# EAGLE board Tecla Shield Through Hole (EAGLE 5.10)
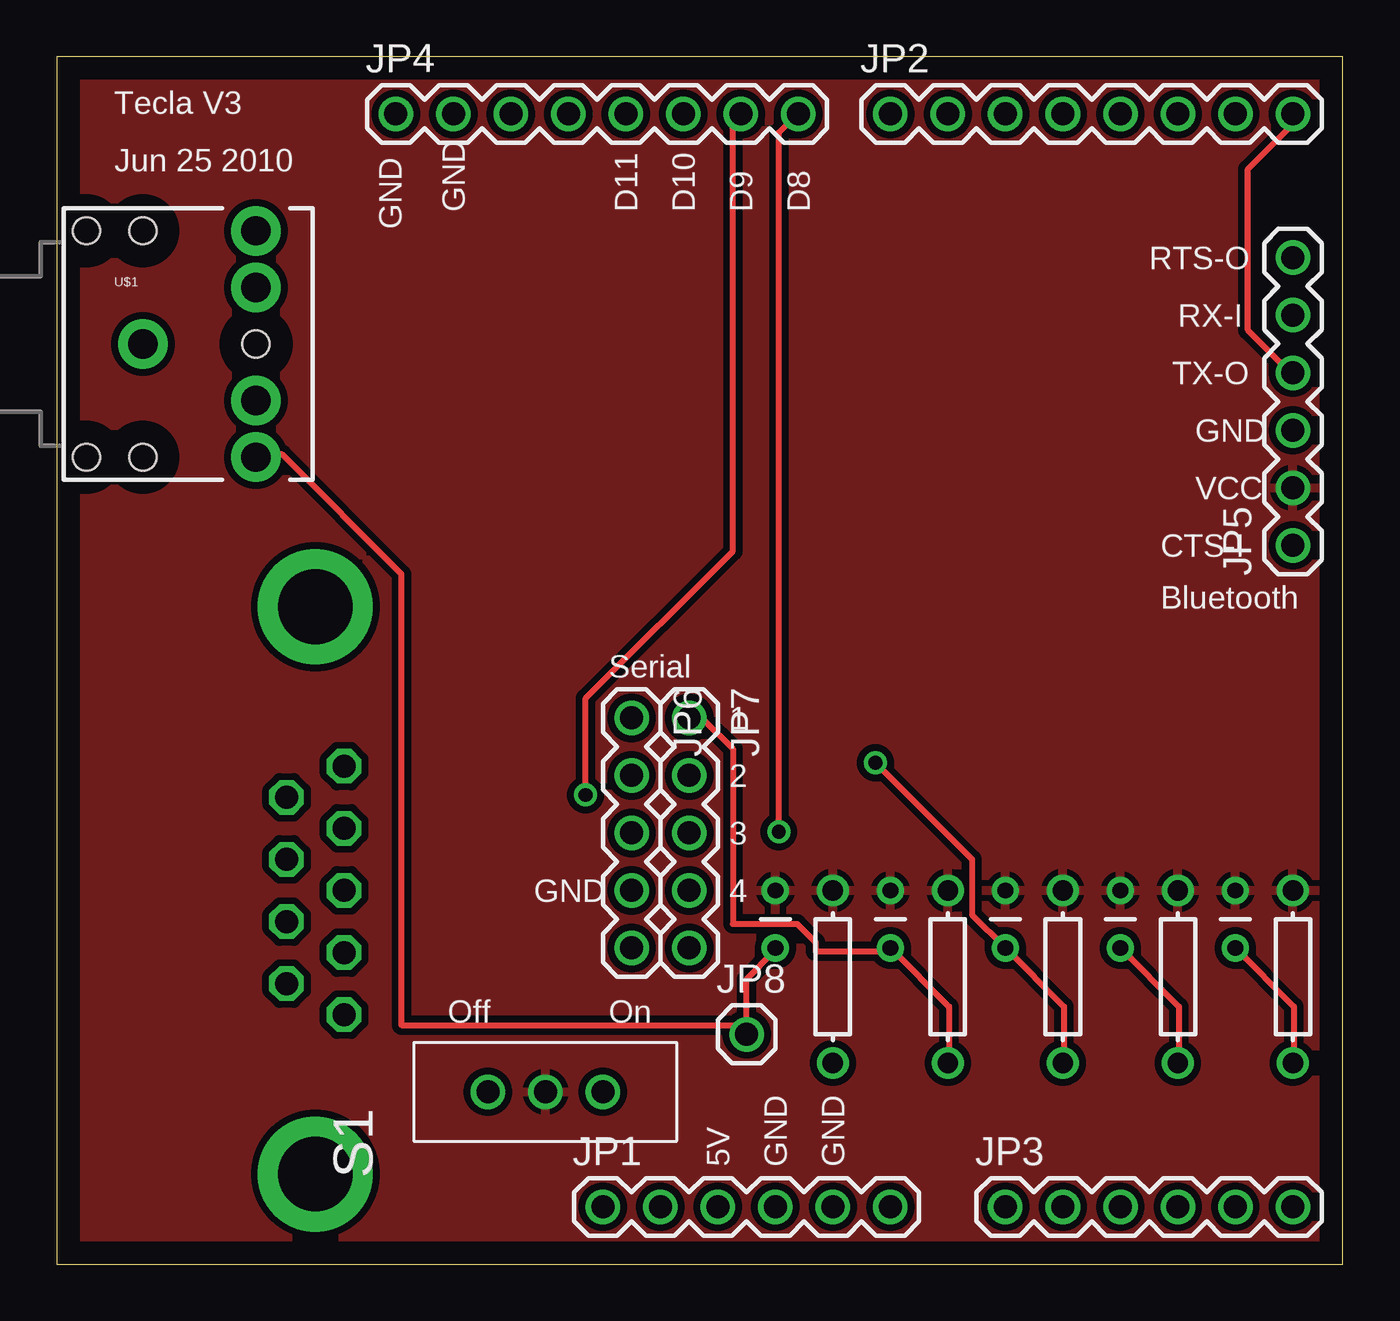
[diagram p0: board, top side]
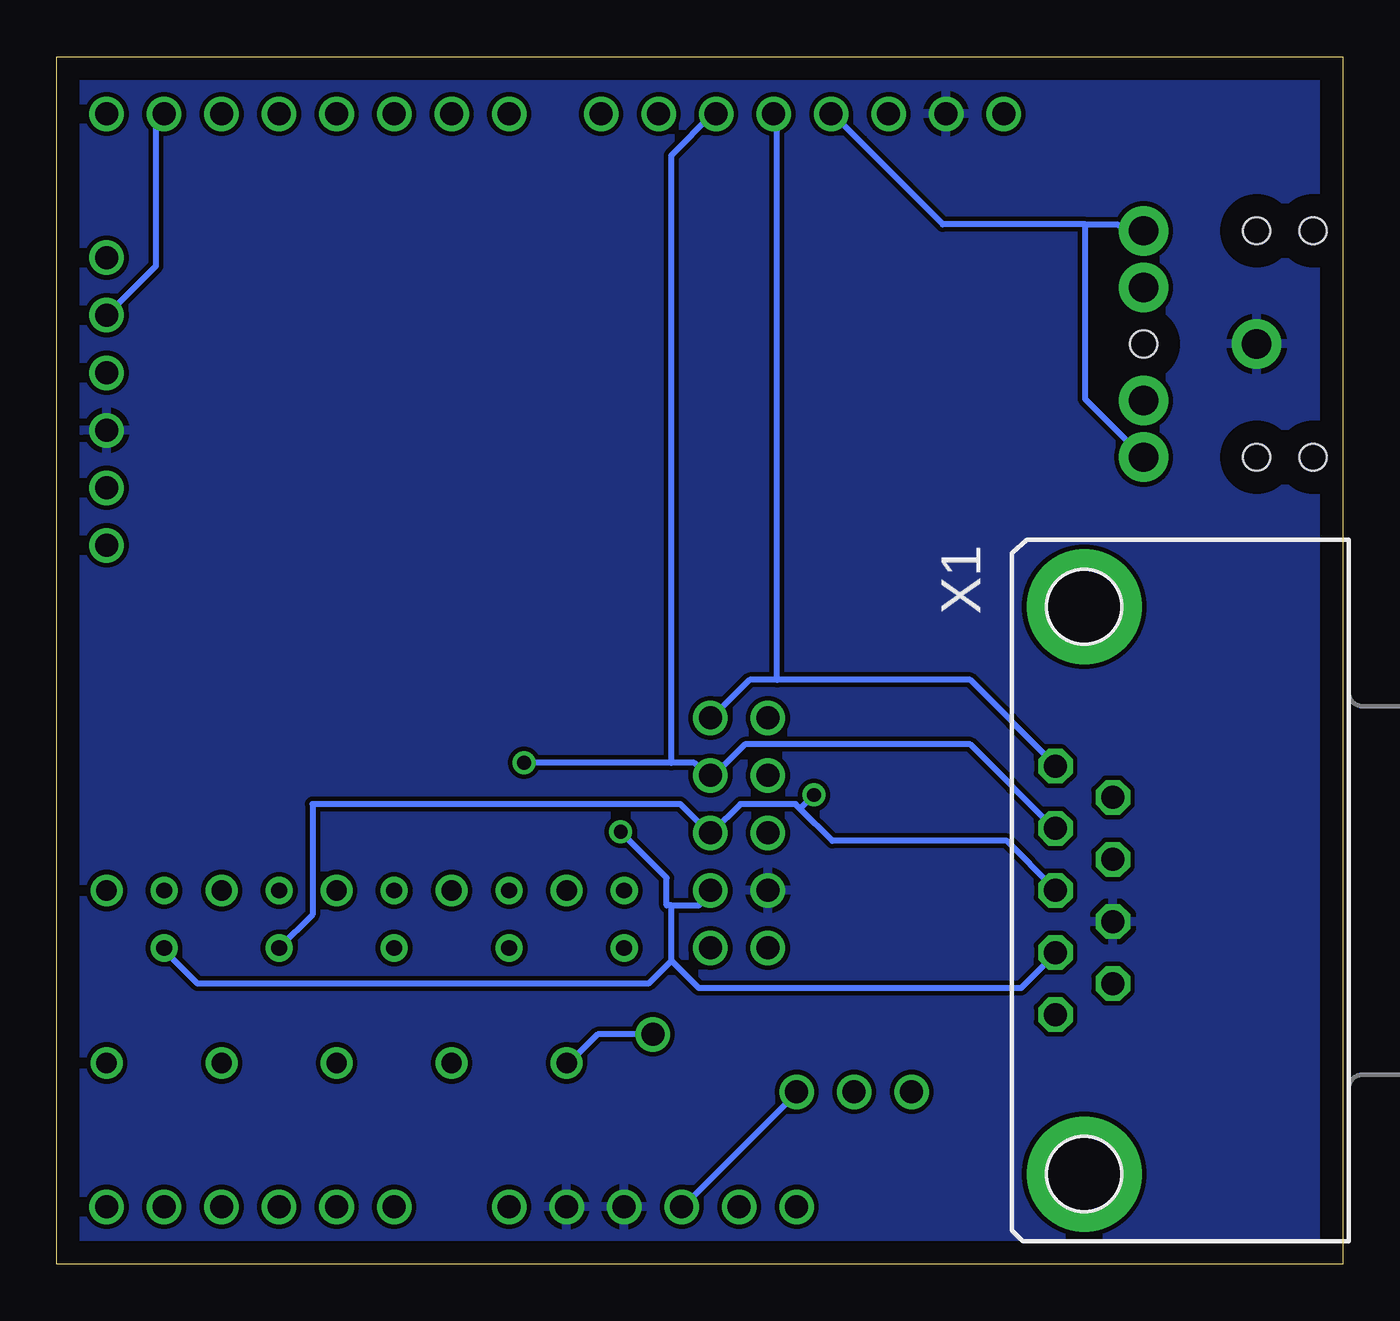
[diagram p1: board, bottom side, seen from below]

Size 56.82 x 53.33 mm. Coordinates in mm from the lower left corner, seen from the top.
Outline: 0,0 56.82,0 56.82,53.33 0,53.33 0,0
Copper layers (1*16): Top 0.035mm / dielectric 1.5mm / Bottom 0.035mm
Design rules "default *": minimum track width 10mil, minimum drill 24mil, track to track 8mil, track to pad 8mil, pad to pad 8mil, via to via 8mil, smd to smd 8mil, copper to edge 40mil, drill to drill 8mil, minimum pad ring 10mil, minimum via ring 8mil, stop-mask expansion 4mil, vias tented up to drill 0mil, thermal gap 10mil

## Footprints (pad centres in the part's own frame; a part is rotated, then mirrored left to right if it is on the bottom)
CAP-PTH-SMALL = drill 0.7 round: 1 0,0; 2 2.54,0
1X06 = drill 1.016 round: 1 0,0; 2 2.54,0; 3 5.08,0; 4 7.62,0; 5 10.16,0; 6 12.7,0
1X08 = drill 1.016 round: 1 0,0; 2 2.54,0; 3 5.08,0; 4 7.62,0; 5 10.16,0; 6 12.7,0; 7 15.24,0; 8 17.78,0
1X05 = drill 1.016 round: 1 0,0; 2 2.54,0; 3 5.08,0; 4 7.62,0; 5 10.16,0
1X01 = drill 1.016 round: 1 0,0
AXIAL-0.3 = drill 0.9 round: P$1 -3.81,0; P$2 3.81,0
SWITCH-SPST = drill 1.016 round: 1 0,2.54; 2 0,0; 3 0,-2.54
AUDIO-JACK = drill 1.3 pad 2.184 round: 1 0,0; 2 5,5; 3 5,2.5; 4 5,-2.5; 5 5,-5 | hole 1.2: 0,5; -2.5,5; -2.5,-5; 0,-5; 5,0
DB9 = drill 1.016 octagon: 1 -5.486,-1.27; 2 -2.743,-1.27; 3 0,-1.27; 4 2.743,-1.27; 5 5.486,-1.27; 6 -4.115,1.27; 7 -1.372,1.27; 8 1.372,1.27; 9 4.115,1.27 | drill 3.302 pad 5.08 round: G1 -12.522,0; G2 12.522,0

## Placement (x,y rotation side)
C1  0.47uF  [CAP-PTH-SMALL]  52.07,16.51 270 top
C2  0.47uF  [CAP-PTH-SMALL]  46.99,16.51 270 top
C3  0.47uF  [CAP-PTH-SMALL]  41.91,16.51 270 top
C4  0.47uF  [CAP-PTH-SMALL]  36.83,16.51 270 top
C5  0.47uF  [CAP-PTH-SMALL]  31.75,16.51 270 top
JP1  Power  [1X06]  24.13,2.54 0 top
JP2  Digital1  [1X08]  36.83,50.8 0 top
JP3  Analog  [1X06]  41.91,2.54 0 top
JP4  Digital2  [1X08]  14.99,50.8 0 top
JP5  Bluetooth  [1X06]  54.61,31.75 90 top
JP6  Serial1  [1X05]  25.4,24.13 270 top
JP7  Serial2  [1X05]  27.94,24.13 270 top
JP8  Extra Pin  [1X01]  30.48,10.16 0 top
R1  1K  [AXIAL-0.3]  54.61,12.7 90 top
R2  1K  [AXIAL-0.3]  49.53,12.7 90 top
R3  1K  [AXIAL-0.3]  44.45,12.7 90 top
R4  1K  [AXIAL-0.3]  39.37,12.7 90 top
R5  1K  [AXIAL-0.3]  34.29,12.7 90 top
S1  [SWITCH-SPST]  21.59,7.62 90 top
U$1  AUDIO-JACKPTH  [AUDIO-JACK]  3.81,40.64 0 top
X1  Serial  [DB9]  11.43,16.51 270 bottom

## Library data of the parts
C1-C5 JP1-JP8 R1-R5 S1 X1 = SparkFun-3-2-07
U$1 = SparkFun

## Nets
+5V: C1.1 C2.1 C3.1 C4.1 C5.1 JP5.2 R1.P$2 R2.P$2 R3.P$2 R4.P$2 R5.P$2 S1.2
N$1: JP2.8 JP5.4
N$2: JP2.7 JP5.5
N$3: JP1.3 S1.3
N$4: C3.2 JP4.6 JP7.2 R3.P$1 X1.2
N$5: C4.2 JP4.5 JP7.1 R4.P$1 X1.1
N$7: C5.2 JP4.4 JP8.1 R5.P$1 U$1.2 U$1.5
N$16: C1.2 JP4.8 JP7.4 R1.P$1 X1.4
PE: JP1.4 JP1.5 JP4.2 JP5.3 JP6.4 U$1.1 X1.8
X1: C2.2 JP4.7 JP7.3 R2.P$1 X1.3

## Tracks (layer width: path | path; a pad name or v marks a point on that pad's centre or on a via)
+5V
  pour Top (isolate 0.305): 0,53.34 57.15,53.34 57.15,0 0,0
N$1
  Top 0.254: JP5.4 54.46,39.42 52.63,41.25 52.63,48.36 54.46,50.19 54.46,50.8 JP2.8
N$2
  Bottom 0.254: JP5.5 52.43,44.09 52.43,50.8 JP2.7
N$3
  Bottom 0.254: JP1.3 29.06,2.64 24.18,7.52 S1.3
N$4  (via drill 0.61)
  Top 0.254: R3.P$1 44.5,8.94 44.5,11.38 C3.2 40.44,15.44 40.44,17.88 v36.17,22.15
  Bottom 0.254: X1.2 12.8,19.3 16.46,22.96 26.42,22.96 27.64,21.74 27.84,21.74 JP7.2 28.04,21.74 28.25,21.74 28.65,22.15 29.67,22.15 | 29.67,22.15 29.67,48.97 27.84,50.8 JP4.6 | 29.67,22.15 v36.17,22.15
N$5
  Top 0.254: R4.P$1 39.42,8.94 39.42,11.38 C4.2 36.78,13.82 33.53,13.82 33.53,14.22 32.72,15.04 29.87,15.04 29.87,22.76 28.65,23.98 28.04,23.98 JP7.1
  Bottom 0.254: 24.99,25.81 26.21,25.81 27.84,24.18 JP7.1 | 24.99,25.81 16.46,25.81 12.8,22.15 X1.1 | 24.99,25.81 24.99,50.8 JP4.5
N$7
  Top 0.254: 30.48,10.57 30.48,12.6 31.7,13.82 C5.2 | 30.48,10.57 15.24,10.57 15.24,30.48 9.96,35.76 8.94,35.76 U$1.5 | 30.48,10.57 JP8.1
  Bottom 0.254: JP8.1 32.92,10.16 34.14,8.94 R5.P$1 | 11.38,45.92 9.96,45.92 9.75,45.72 8.94,45.72 U$1.2 | 11.38,45.92 17.68,45.92 22.55,50.8 JP4.4 | 11.38,45.92 11.38,38.2 8.94,35.76 U$1.5
N$16  (via drill 0.61)
  Top 0.254: C1.2 54.66,11.38 54.66,8.94 R1.P$1 | v31.9,19.1 31.9,49.99 32.72,50.8 JP4.8
  Bottom 0.254: 29.67,13.41 28.45,12.19 14.22,12.19 12.8,13.61 X1.4 | 29.67,13.41 29.67,15.85 | 29.67,15.85 28.45,15.85 27.84,16.46 JP7.4 | v31.9,19.1 29.87,17.07 29.87,15.85 29.67,15.85 | 29.67,13.41 30.68,12.39 50.6,12.39 52.02,13.82 C1.2
PE
  pour Bottom: 0,53.34 58.42,53.34 58.42,0 0,0
X1  (via drill 0.61)
  Top 0.254: C2.2 49.58,11.38 49.58,8.94 R2.P$1 | v23.37,20.73 23.37,24.99 29.87,31.5 29.87,50.6 30.07,50.8 JP4.7
  Bottom 0.254: 23.98,20.12 24.18,20.32 26.62,20.32 27.84,19.1 JP7.3 28.04,19.1 29.26,20.32 45.52,20.32 45.52,15.44 C2.2 | 23.98,20.12 22.55,18.69 14.83,18.69 12.8,16.66 X1.3 | 23.98,20.12 v23.37,20.73

## Text on the board
tPlace: Tecla V3 | Jun 25 2010 | GND | GND | D11 | D10 | D9 | D8 | RTS-O | RX-I | TX-O | GND | VCC | CTS-I | Bluetooth | Serial | 1 | 2 | 3 | GND | 4 | Off | On | 5V | GND | GND